# Altium PCB vehicle electronics.PcbDoc
Units mm, origin at the board's own origin, x right, y up, seen from the top; angles counter-clockwise.
Board outline 57.16 x 86.49 mm, 2 copper layers (Top Layer, Bottom Layer); 15 components, 41 nets, 109 pads, 18 vias.
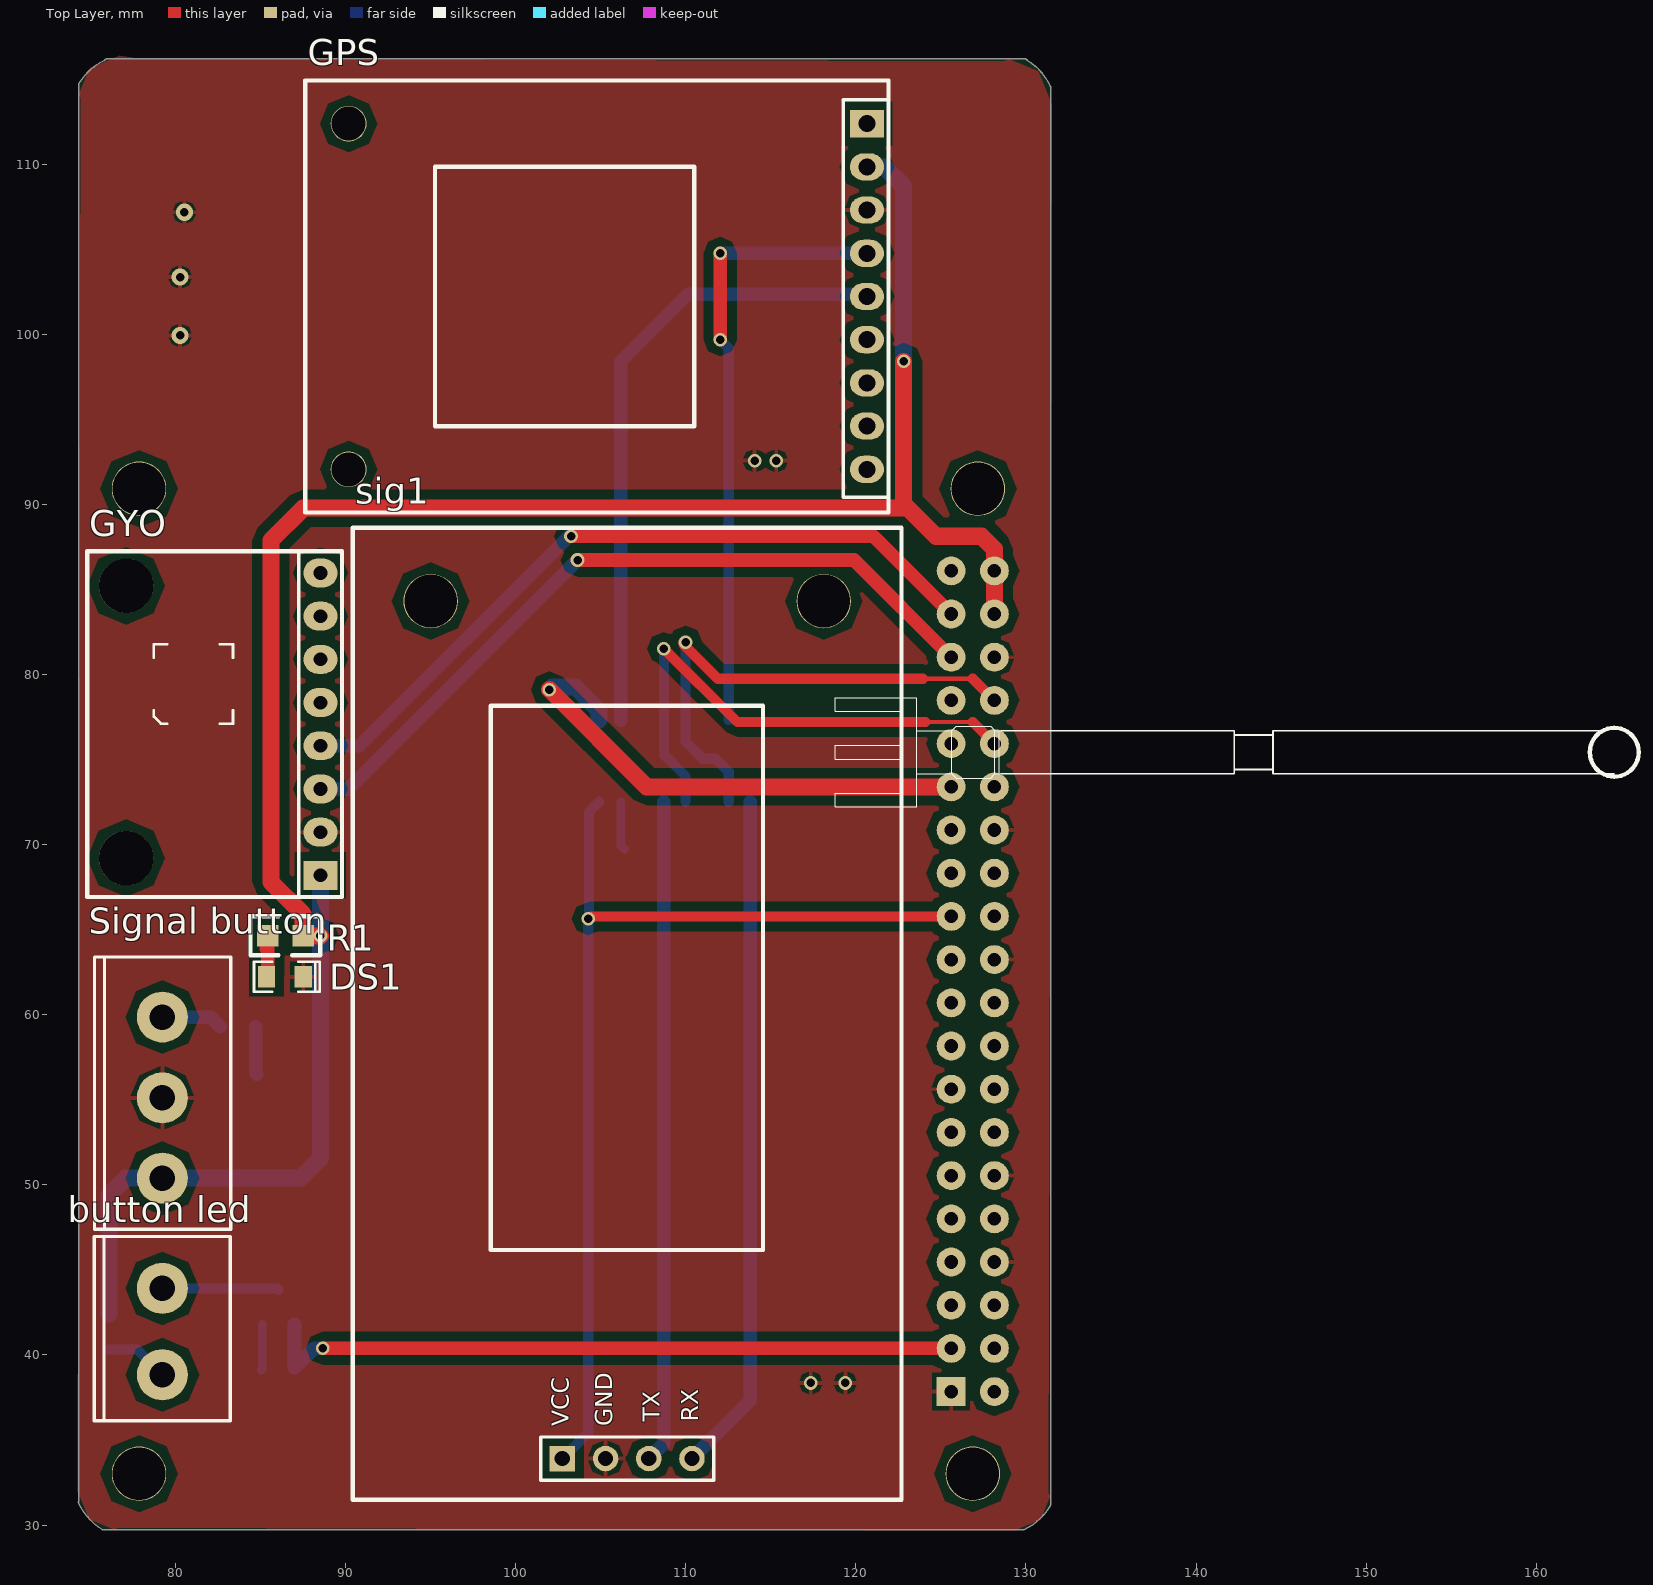
[diagram p0: Top Layer view]
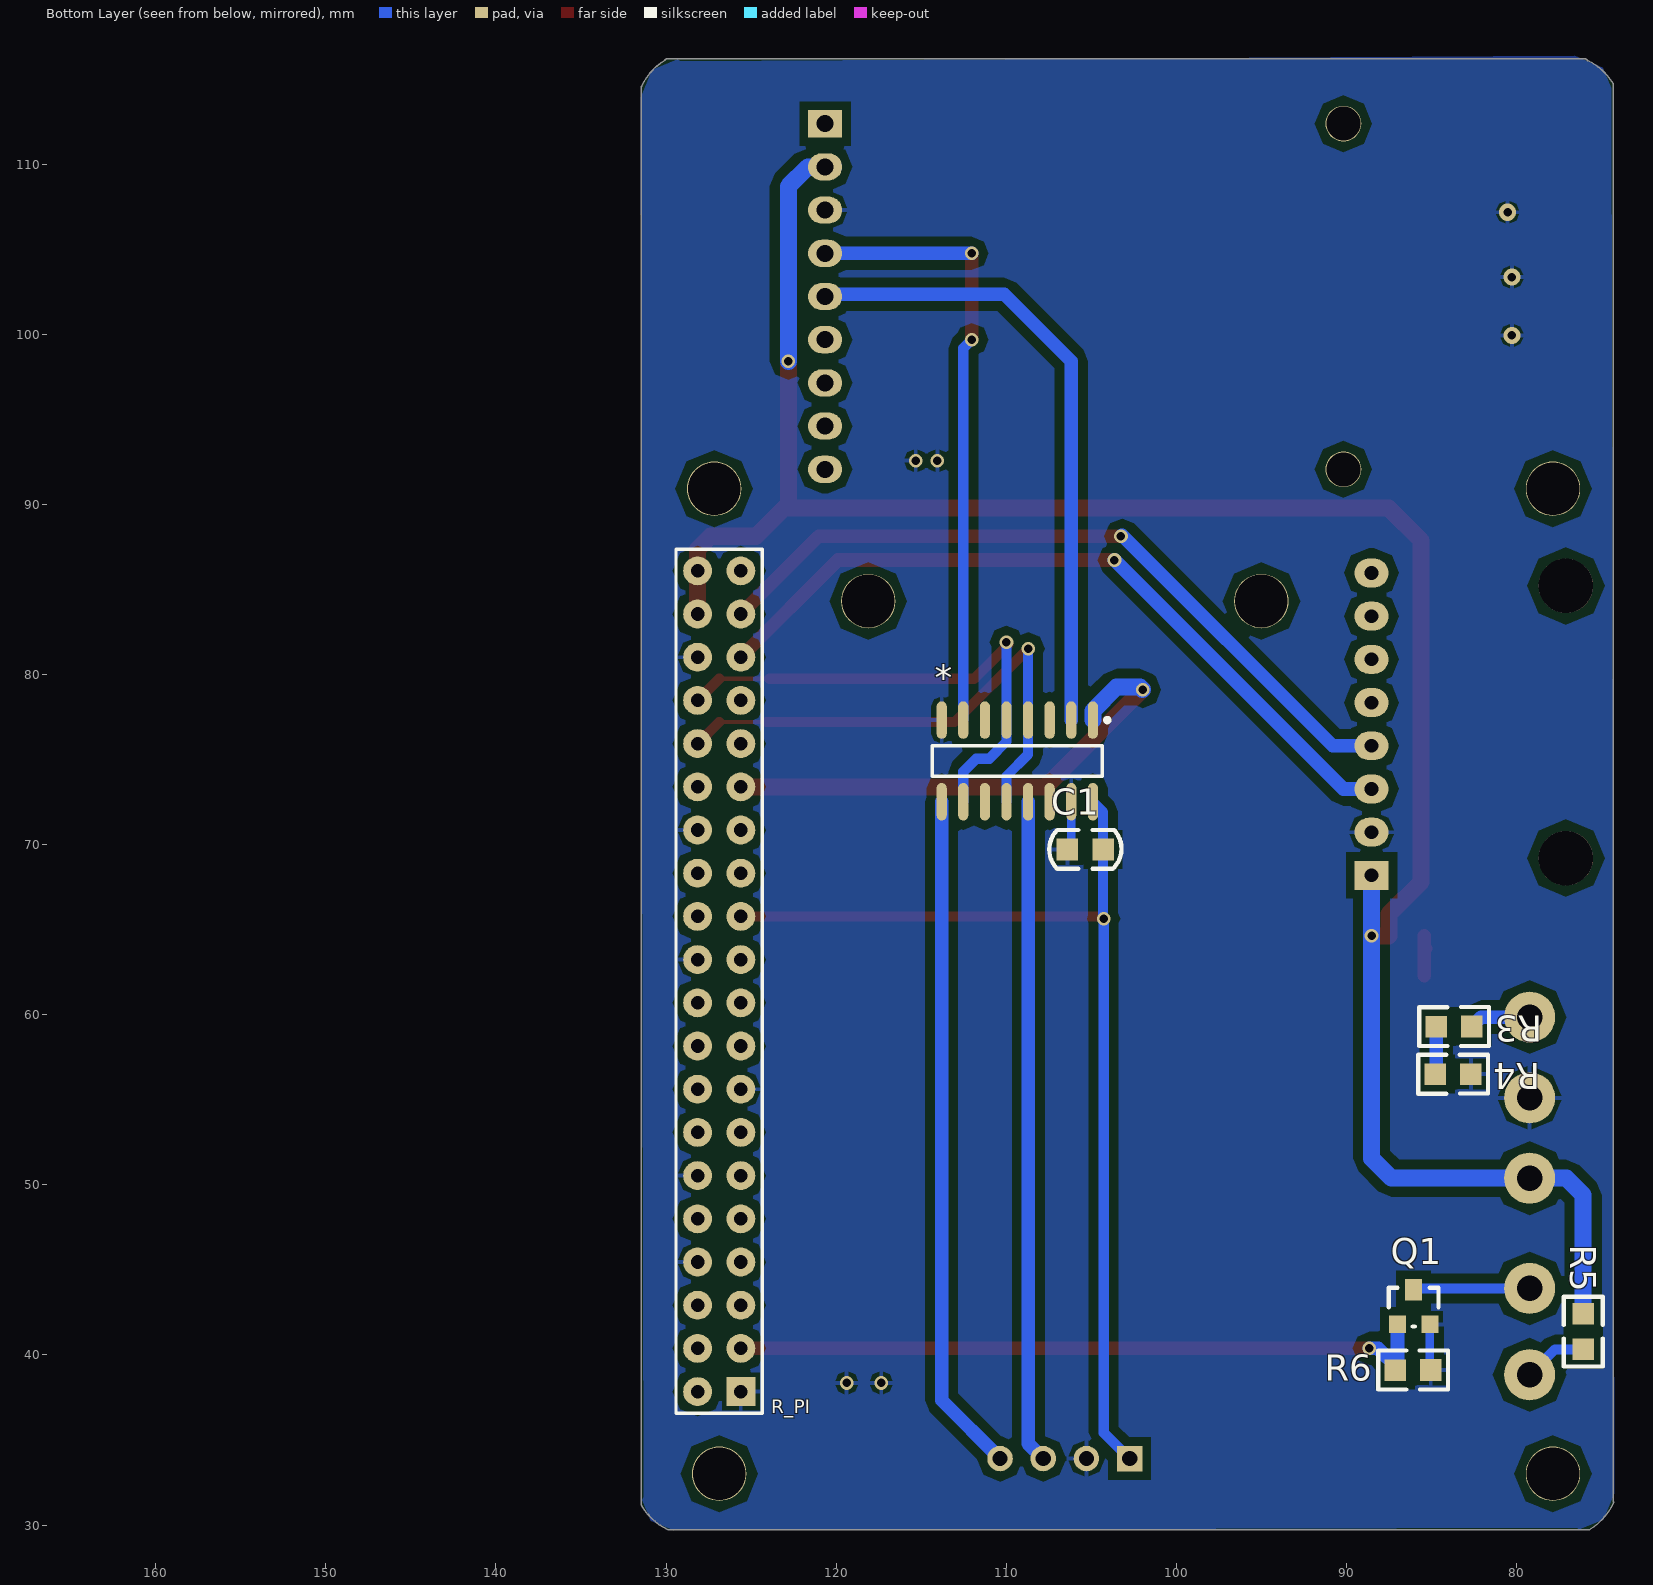
[diagram p1: Bottom Layer view, seen from below]
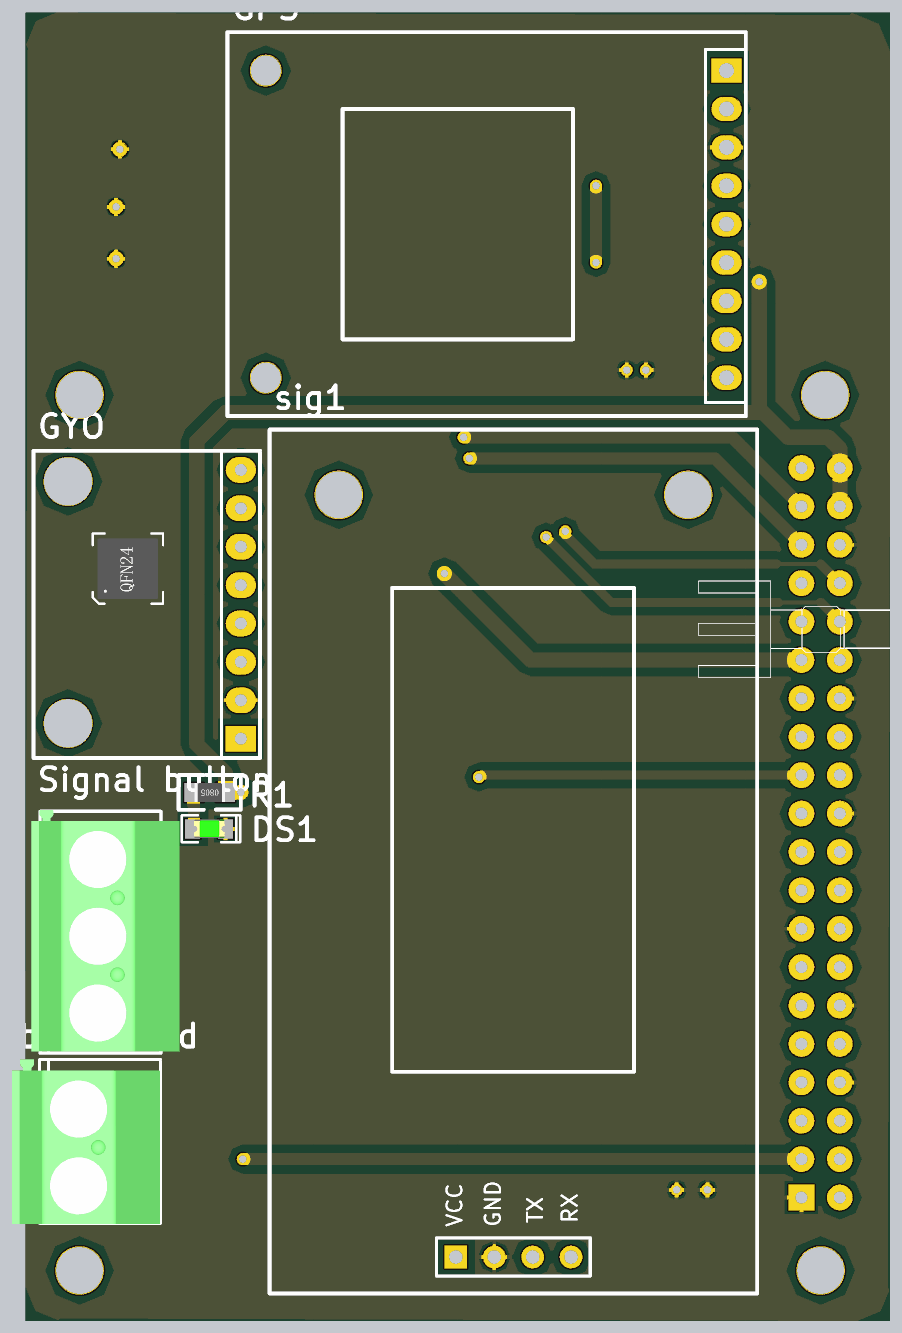
[diagram p2: 3D render of the assembled board from above, using the file's embedded part models]
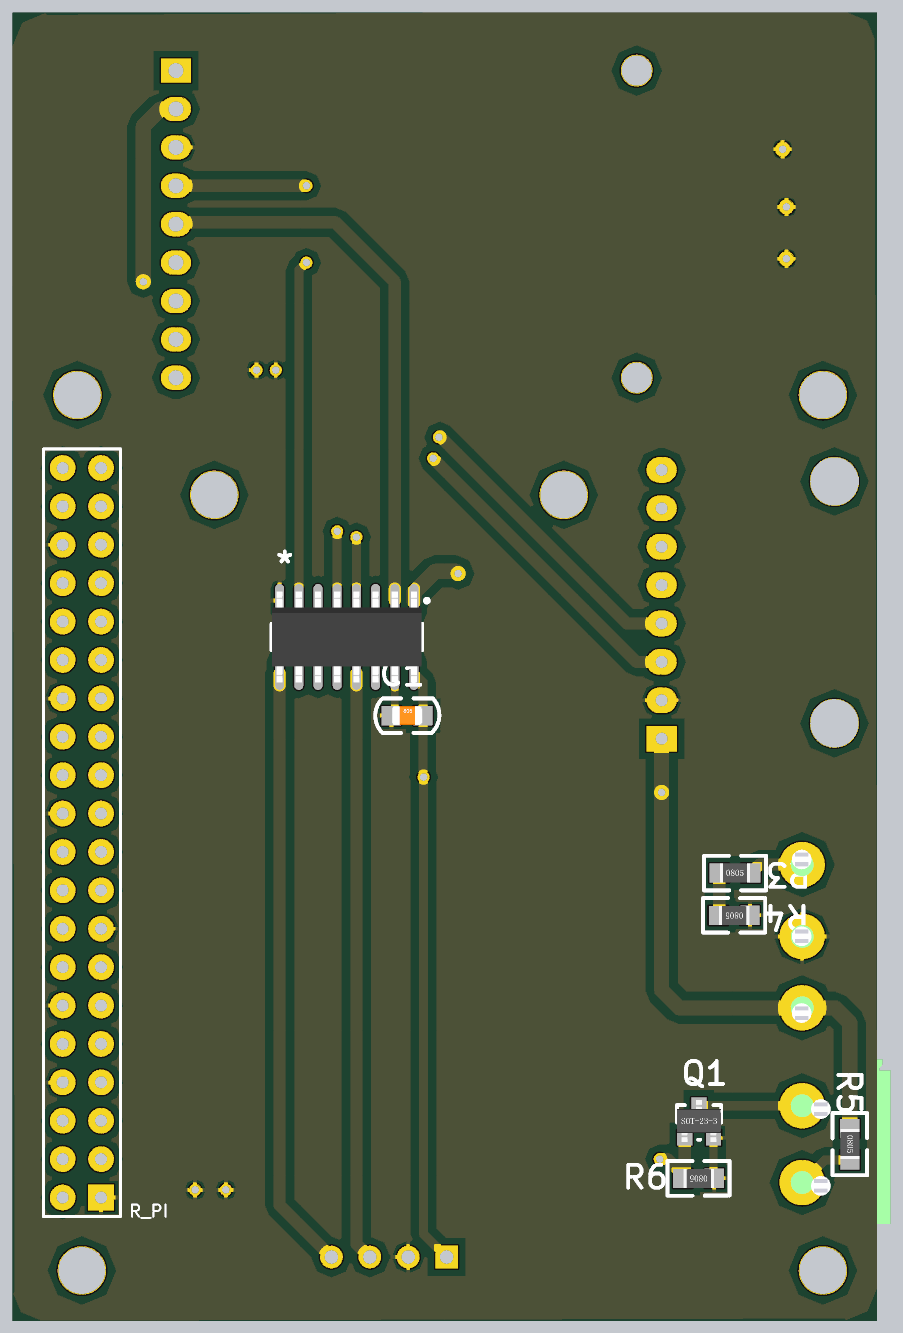
[diagram p3: 3D render of the assembled board from below, using the file's embedded part models]

## Layer stack, top to bottom
Top Solder: solder mask 0.0102, Solder Resist, Dk 3.5
Top Layer: signal copper 0.0356
Dielectric 1: dielectric 0.32, FR-4, Dk 4.8
Bottom Layer: signal copper 0.0356
Bottom Solder: solder mask 0.0102, Solder Resist, Dk 3.5

## Board outline
74.299,31.278 ccw(c77.597,32.861) 75.695,29.736 ccw(c75.761,29.845) 75.795,29.722 129.774,29.722 ccw(c129.83,29.837) 129.885,29.722 ccw(c128.302,33.02) 131.427,31.118 ccw(c131.318,31.184) 131.445,31.184 ccw(c131.318,31.184) 131.442,31.213 ccw(c131.318,31.242) 131.445,31.242 131.445,114.554 ccw(c131.318,114.554) 131.433,114.609 ccw(c128.135,113.026) 130.067,116.133 ccw(c129.957,116.078) 129.957,116.201 75.946,116.201 ccw(c75.946,116.078) 75.837,116.134 ccw(c77.438,112.845) 74.313,114.747 ccw(c74.422,114.681) 74.299,114.647 74.299,31.389 ccw(c74.414,31.333)

## Design rules (kind name [scope] priority, off if disabled: settings)
Clearance [All] p1: gap=0.25
PolygonConnect [All] p1: connectstyle=Relief reliefconductorwidth=0.254 reliefentries=4 polygonreliefangle="90 Angle" airgapwidth=0.254
RoutingVias [All] p1: holewidth=0.711 width=1.27 viastyle="Through Hole" minholewidth=0.711 minwidth=1.27 maxholewidth=0.711 maxwidth=1.27
SolderMaskExpansion [All] p1: expansion=0.102
Width [All] p1: maxlimit=2 minlimit=0.254 preferedwidth=0.254 minimp=50.000000 maximp=50.000000 favimp=50.000000
29 further rules are at their usual default settings.

## Components (designator, comment, footprint, x,y, rotation, side; value= is the part's Value field where it differs from the comment)
* "SN74LVC157" SOIC-16 109.347,74.93 r270 bottom
"button led" "H-2" 2PIN-5.08A 79.248,41.656 r90 top
C1 "CAP_sop" C0805 106.553,69.723 r180 bottom
DS1 "LED_SOP" LED0805G 85.344,62.23 r0 top
GPS "Ultimate GPS" GPS 105.41,102.235 r180 top
GYO "Gyroscope" gryoscope 81.915,76.327 r90 top
Q1 "MOSFET-N" SOT-23 87.116,41.783 r180 bottom
R1 "1K" R0805 87.503,64.648 r180 top
R3 "10K" R0805 84.709,59.309 r180 bottom
R4 "18K" R0805 82.677,56.515 r0 bottom
R5 "1K" R0805 76.073,42.418 r270 bottom
R6 "10K" R0805 85.034,39.116 r0 bottom
R_PI "Header 2X20" HDR2-20 126.873,61.976 r90 bottom
sig1 "Sigfox" Sigfox 107.442,60.452 r0 top
"Signal button" "H-3" 3PIN-5.08A 79.248,50.038 r90 top

## Footprints (in the part's own frame and the unit in brackets; to place one, negate y for a bottom-side part, rotate by r counter-clockwise, add the part's x,y. Pads: shape width x height; smd on the part's side, far side on the other; paste and mask are expansions set on the pad)
2PIN-5.08A [mm]
  round 3 hole 1.5: 1(-2.819,0.025) 2(2.261,0.025)
  silkscreen extent -5.51,-3.96 5.31,4.04, body extent -5.58,-3.94 5.32,5.86, height 14.2
3PIN-5.08A [mm]
  round 3 hole 1.5: 1(0.356,0.025) 2(5.08,0.025) 3(9.83,0.025)
  silkscreen extent -2.64,-3.99 13.36,4.01, body extent -2.53,-5.21 13.45,4.59, height 14.2
C0805 [mil]
  rect 50x50 smd: 1(6,0) 2(88.7,-0.1)
  silkscreen extent -36,-45 131,45, body extent 8,-25 87,25, height 30
GPS [mm]
  oval 2x1.6 hole 1: 1(-15.24,10.16) 2(-15.24,7.62) 3(-15.24,5.08) 4(-15.24,2.54) 5(-15.24,0) 6(-15.24,-2.54) 7(-15.24,-5.08) 8(-15.24,-7.62)
  rect 2x1.6 hole 1: 9(-15.24,-10.16)
  round 2.1 hole 2: ""(15.24,-10.16) ""(15.24,10.16)
  silkscreen extent -16.53,-12.7 17.78,12.7, body extent -16.51,-12.7 17.78,12.7, height 4.5
gryoscope [mm]
  rect 1.7x2 hole 0.8: 1(-8.128,-6.604)
  oval 1.7x2 hole 0.8: 2(-5.588,-6.604) 3(-3.048,-6.604) 4(-0.508,-6.604) 5(2.032,-6.604) 6(4.572,-6.604) 7(7.112,-6.604) 8(9.652,-6.604)
  round 3.2 hole 3.2: ""(-7.112,4.826) ""(8.89,4.826)
  silkscreen extent -9.4,-7.87 10.92,7.11, body extent -9.4,-7.87 10.92,7.11, height 0.9
HDR2-20 [mm]
  rect 1.7x1.7 hole 0.8: 1(-24.13,-1.27)
  round 1.7 hole 0.8: 2(-24.13,1.27) 3(-21.59,-1.27) 4(-21.59,1.27) 5(-19.05,-1.27) 6(-19.05,1.27) 7(-16.51,-1.27) 8(-16.51,1.27) 9(-13.97,-1.27) 10(-13.97,1.27) 11(-11.43,-1.27) 12(-11.43,1.27) 13(-8.89,-1.27) 14(-8.89,1.27) 15(-6.35,-1.27) 16(-6.35,1.27) 17(-3.81,-1.27) 18(-3.81,1.27) 19(-1.27,-1.27) 20(-1.27,1.27) 21(1.27,-1.27) 22(1.27,1.27) 23(3.81,-1.27) 24(3.81,1.27) 25(6.35,-1.27) 26(6.35,1.27) 27(8.89,-1.27) 28(8.89,1.27) 29(11.43,-1.27) 30(11.43,1.27) 31(13.97,-1.27) 32(13.97,1.27) 33(16.51,-1.27) 34(16.51,1.27) 35(19.05,-1.27) 36(19.05,1.27) 37(21.59,-1.27) 38(21.59,1.27) 39(24.13,-1.27) 40(24.13,1.27)
  silkscreen extent -25.4,-2.54 25.4,2.54
LED0805G [mil]
  rect 40x50 smd: 1(0,0) 2(85,0)
  silkscreen extent -29,-35 123,35, body extent 3,-24 83,25, height 43
R0805 [mm] "1/8W"
  rect 1.27x1.27 smd: 1(0,0) 2(2.09,0.005)
  silkscreen extent -1.01,-1.14 3.1,1.15, body extent 0.04,-0.62 2.04,0.64, height 0.55
Sigfox [mm]
  rect 1.5x1.5 hole 0.9: 1(-4.699,-26.543)
  round 1.5 hole 0.9: 2(-2.159,-26.543) 3(0.381,-26.543) 4(2.921,-26.543)
  round 3.2 hole 3.1: ""(-12.446,23.876) ""(10.668,23.876)
  silkscreen extent -17.02,-28.96 58.59,28.19, body extent -17.02,-28.96 15.24,28.19, height 1.5
SOIC-16 [mm] "SOIC, 16-Leads, Body 9.90x3.90mm, Pitch 1.27mm, IPC Medium Density"
  oval 2.2x0.6 smd: 1(-2.4,4.445) 2(-2.4,3.175) 3(-2.4,1.905) 4(-2.4,0.635) 5(-2.4,-0.635) 6(-2.4,-1.905) 7(-2.4,-3.175) 8(-2.4,-4.445) 9(2.4,-4.445) 10(2.4,-3.175) 11(2.4,-1.905) 12(2.4,-0.635) 13(2.4,0.635) 14(2.4,1.905) 15(2.4,3.175) 16(2.4,4.445)
  silkscreen extent -2.52,-5 0.9,5.42, body extent -3,-4.95 3,4.95, height 1.4
SOT-23 [mil]
  rect 40x40 smd: 1(4.88,0.63) 3(79.88,0.63)
  rect 40x50 smd: 2(41.88,80.63)
  silkscreen extent -15,-4 100,86, body extent -15,-11 99,99, height 47

## Part data
"button led": "Header, 2-Pin"
C1: "capacitance"
Q1: "N-Channel MOSFET"
R1 R3 R4 R5 R6: library part res_sop
R_PI: "Header, 20Pin, Dual row"
"Signal button": "Header, 3-Pin"

## Free pads (board coordinates)
  round 3.2 hole 3.1: ""(77.851,33.02) ""(77.851,90.932) ""(126.873,33.02) ""(127.171,90.932)

## Via types
v1: diameter 0.8, hole 0.5, Top Layer to Bottom Layer, 15 vias
v2: diameter 1, hole 0.5, Top Layer to Bottom Layer, 3 vias

## Nets (pads, with @x,y where several pads share a name; then routed paths per layer and width w, separated by ;. In a path a pad name is that pad's centre, name@x,y a point inside that pad or via, vN(x,y) a via of type N, cw(c..) or ccw(c..) an arc to the next point about the centre after c; other vN are vias at no path point)
3.3V: *.16 C1.2 R_PI.23 sig1.1 | length 60.9
  Top Layer w0.6: v1(104.267,65.659) 104.394,65.786 R_PI.23
  Bottom Layer w0.6: sig1.1 104.267,35.433 v1(104.267,65.659) 104.3,65.692 C1.2 104.3,71.928 *.16
"3.3V 2": R_PI.39
5V: "Signal button.1" GPS.8 GYO.1 R1.1 R5.1 R_PI.38 R_PI.40 | length 132.3
  Top Layer w1: v1@88.519,64.648 R1.1 87.503,65.913 85.598,67.818 85.598,87.884 87.503,89.789 123.063,89.789 ; v1(122.809,98.425) 122.809,90.043 124.714,88.138 127.381,88.138 128.143,87.376 R_PI.40 R_PI.38
  Bottom Layer w1: R5.1 76.073,49.403 77.064,50.394 79.223,50.394 87.351,50.394 88.519,51.562 GYO.1 ; GPS.8@120.142,109.855 121.666,109.855 122.809,108.712 v1(122.809,98.425)
  other v1: 88.519,64.643
GND: "Signal button.2" *.8 *.15 C1.1 DS1.2 GPS.7 GYO.2 Q1.3 R4.1 R6.1 R_PI.1 R_PI.8 R_PI.12 R_PI.15 R_PI.22 R_PI.28 R_PI.36 sig1.2 | length 5.6
  Bottom Layer w0.5: R6.1 85.087,39.169 Q1.3 ; *.15 106.172,69.952 C1.1
  other v1: 117.348,38.354 119.38,38.354 114.046,92.583 115.316,92.583
  other v2: 80.264,99.949 80.264,103.378 80.518,107.188
GPIO4: R_PI.33
GPIO6: R_PI.9
GPIO16: R_PI.6
GPIO17: *.1 R_PI.29 | length 30.1
  Top Layer w1: v1(101.981,79.121) 107.696,73.406 R_PI.29
  Bottom Layer w1: v1(101.981,79.121) 102.133,79.273 103.505,79.273 104.902,77.876 *.1
GPIO18: R_PI.30 | length 0.4
  Top Layer w0.8: R_PI.30 R_PI.30@128.524,73.406
GPIO19: R_PI.5
GPIO20: R_PI.4
GPIO21: R_PI.2
GPIO22: R_PI.25
GPIO23: R_PI.26
GPIO24: R_PI.24
GPIO25: R_PI.20
GPIO26: Q1.1 R6.2 R_PI.3 | length 41.6
  Top Layer w0.8: v1(88.646,40.386) R_PI.3
  Bottom Layer w0.8: Q1.1 86.992,39.243 88.135,40.386 v1(88.646,40.386)
GPIO27: R_PI.27
ID_SC: R_PI.14
ID_SD: R_PI.13
MISO: R_PI.19
MOSI: R_PI.21
"Netbutton led_1": "button led.1" R5.2 | length 3.8
  Bottom Layer w0.6: R5.2 77.732,40.328 79.223,38.837
"Netbutton led_2": "button led.2" Q1.2 | length 6.9
  Bottom Layer w0.6: 79.223,43.917 85.967,43.917 Q1.2
NetDS1_1: DS1.1 R1.2 | length 2.4
  Top Layer w0.8: 85.344,63.881 85.413,63.95 ; DS1.1@85.413,62.299 R1.2
NetR3_2: "Signal button.3" R3.2 | length 3.6
  Bottom Layer w0.8: 79.223,59.868 82.065,59.868 R3.2
R_PWM_0: R_PI.10
R_PWM_1: R_PI.7
RX1: *.7 GPS.6 | length 35.8
  Top Layer w0.8: v1(112.014,99.695) v1(112.014,104.775)
  Bottom Layer w0.6: v1(112.014,99.695) 112.522,99.187 *.7
  Bottom Layer w0.8: v1(112.014,104.775) GPS.6@120.142,104.775
RX2: *.9 sig1.4 | length 40
  Bottom Layer w0.8: sig1.4 113.792,37.338 *.9
RXD: *.4 *.12 R_PI.32 | length 31.3
  Top Layer w0.254: 124.079,77.216 126.873,77.216
  Top Layer w0.6: v1(108.712,81.534) 113.03,77.216 124.079,77.216 ; 126.873,77.216 R_PI.32
  Bottom Layer w0.6: v1(108.712,81.534) *.4 108.712,75.311 109.982,74.041 *.12
SCL: GYO.3 R_PI.35 | length 45
  Top Layer w0.8: v1(103.632,86.741) 119.888,86.741 R_PI.35
  Bottom Layer w0.8: GYO.3 90.17,73.279 v1(103.632,86.741)
SCLK: R_PI.17
SDA: GYO.4 R_PI.37 | length 44
  Top Layer w0.8: v1(103.251,88.138) 121.031,88.138 R_PI.37
  Bottom Layer w0.8: GYO.4 90.805,75.819 v1@103.188,88.201
SIGNAL: R3.1 R4.2 | length 2.8
  Bottom Layer w0.8: R3.1 84.709,56.568 R4.2
SS1: R_PI.18
SS2: R_PI.16
SS3: R_PI.11
TX1: *.2 GPS.5 | length 36.4
  Bottom Layer w0.8: *.2 106.172,98.425 110.109,102.362 GPS.5@119.888,102.362
TX2: *.13 sig1.3 | length 39
  Bottom Layer w0.8: sig1.3 108.712,34.798 *.13
TXD: *.5 *.10 R_PI.34 | length 30.5
  Top Layer w0.254: 123.952,79.756 126.873,79.756
  Top Layer w0.6: v1@109.855,81.788 111.887,79.756 123.952,79.756 ; 126.873,79.756 R_PI.34
  Bottom Layer w0.6: v1(109.982,81.915) *.5 109.982,76.073 110.998,75.057 111.76,75.057 112.522,74.295 *.10
pads on no net: *.3 *.6 *.11 *.14 GPS. GPS.1 GPS.2 GPS.3 GPS.4 GPS.9 GYO. GYO.5 GYO.6 GYO.7 GYO.8 R_PI.31 sig1.

## Polygon pours and split planes (outlines as drawn)
GND on Bottom Layer "GND" (solid, pour order 4): 76.581,116.205 ccw(c76.581,114.046) 74.422,114.046 74.422,113.919 74.422,31.877 ccw(c76.454,31.877) 76.454,29.845 129.54,29.845 ccw(c129.54,31.623) 131.318,31.623 131.318,113.919 ccw(c129.159,113.919) 129.159,116.078
GND on Top Layer "GND" (solid, pour order 6): 77.851,116.205 76.708,116.205 ccw(c76.708,113.919) 74.422,113.919 74.422,32.004 ccw(c76.581,32.004) 76.581,29.845 129.286,29.845 ccw(c129.286,31.877) 131.318,31.877 131.318,113.538 ccw(c128.778,113.538) 128.778,116.078 128.524,116.078

## Silkscreen, mask and mechanical layers (free items; w line width, h text height)
Mechanical 1:
  lines w0.245: 74.422,31.333 74.422,114.681 ; 75.761,29.845 129.83,29.845 ; 75.946,116.078 129.957,116.078
  lines w0.254: 74.414,31.333 ccw(c77.597,32.861) 75.761,29.845 ; 74.422,114.681 cw(c77.438,112.845) 75.958,116.051 ; 129.83,29.837 ccw(c128.302,33.02) 131.318,31.184 ; 129.971,116.042 cw(c128.135,113.026) 131.318,114.554 131.318,82.169 131.318,36.576 131.318,31.242

## Text inside footprints (layer, text, board x,y; h text height)
sig1: Top Overlay "VCC" at 103.124,35.814 h1 r90; Top Overlay "GND" at 105.664,35.814 h1 r90; Top Overlay "TX" at 108.458,36.068 h1 r90; Top Overlay "RX" at 110.744,36.068 h1 r90